# Altium PCB plane_2023-07-22.pcbdoc
Units mil, origin at the board's own origin, x right, y up, seen from the top; angles counter-clockwise.
Board outline 3997.21 x 4242.49 mil, 2 copper layers (Top Layer, Bottom Layer); 10 components, 27 nets, 47 pads, 80 vias.
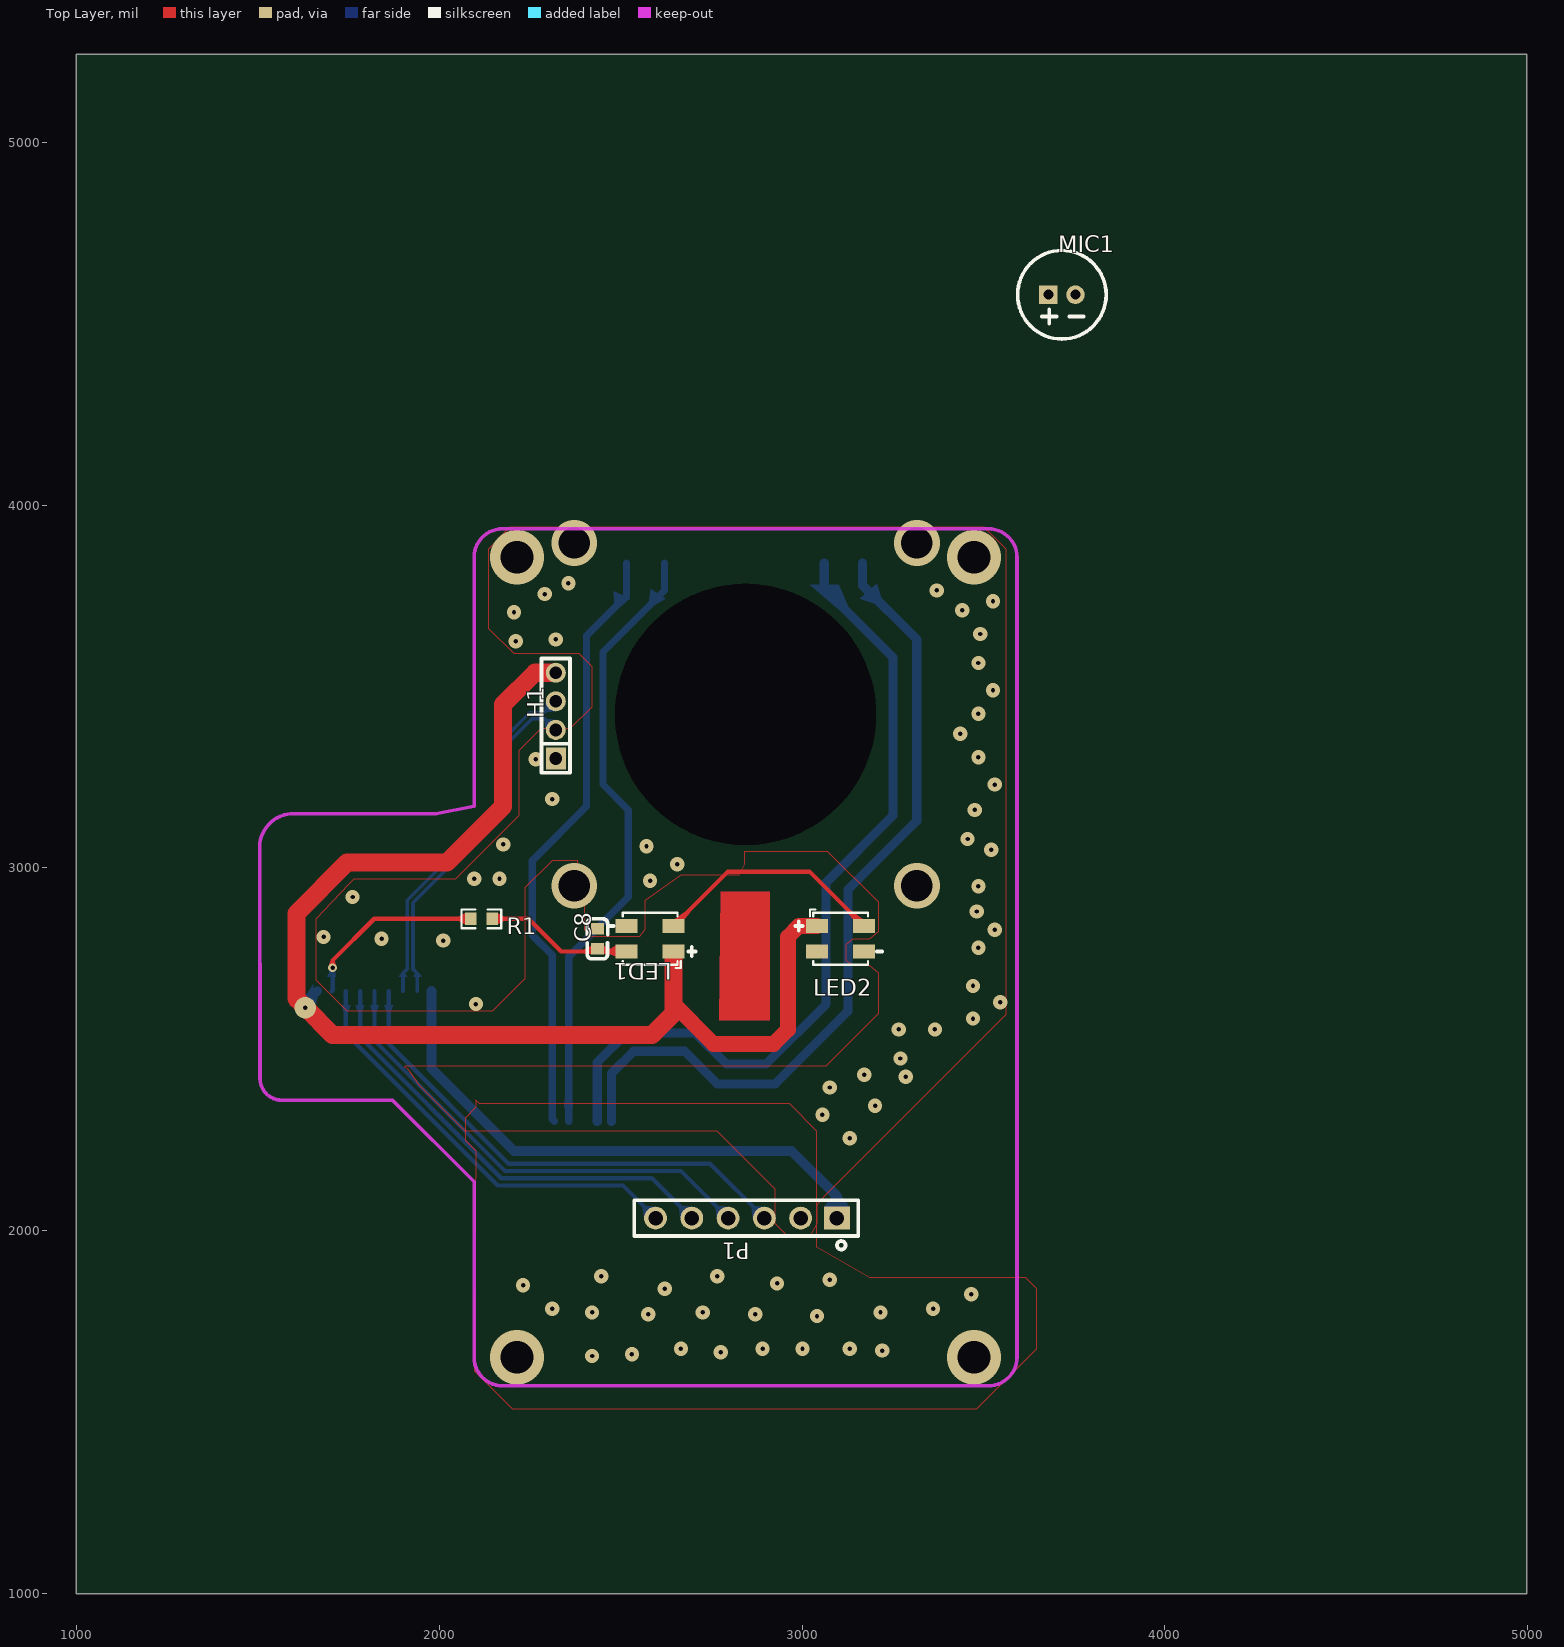
[diagram p0: Top Layer view]
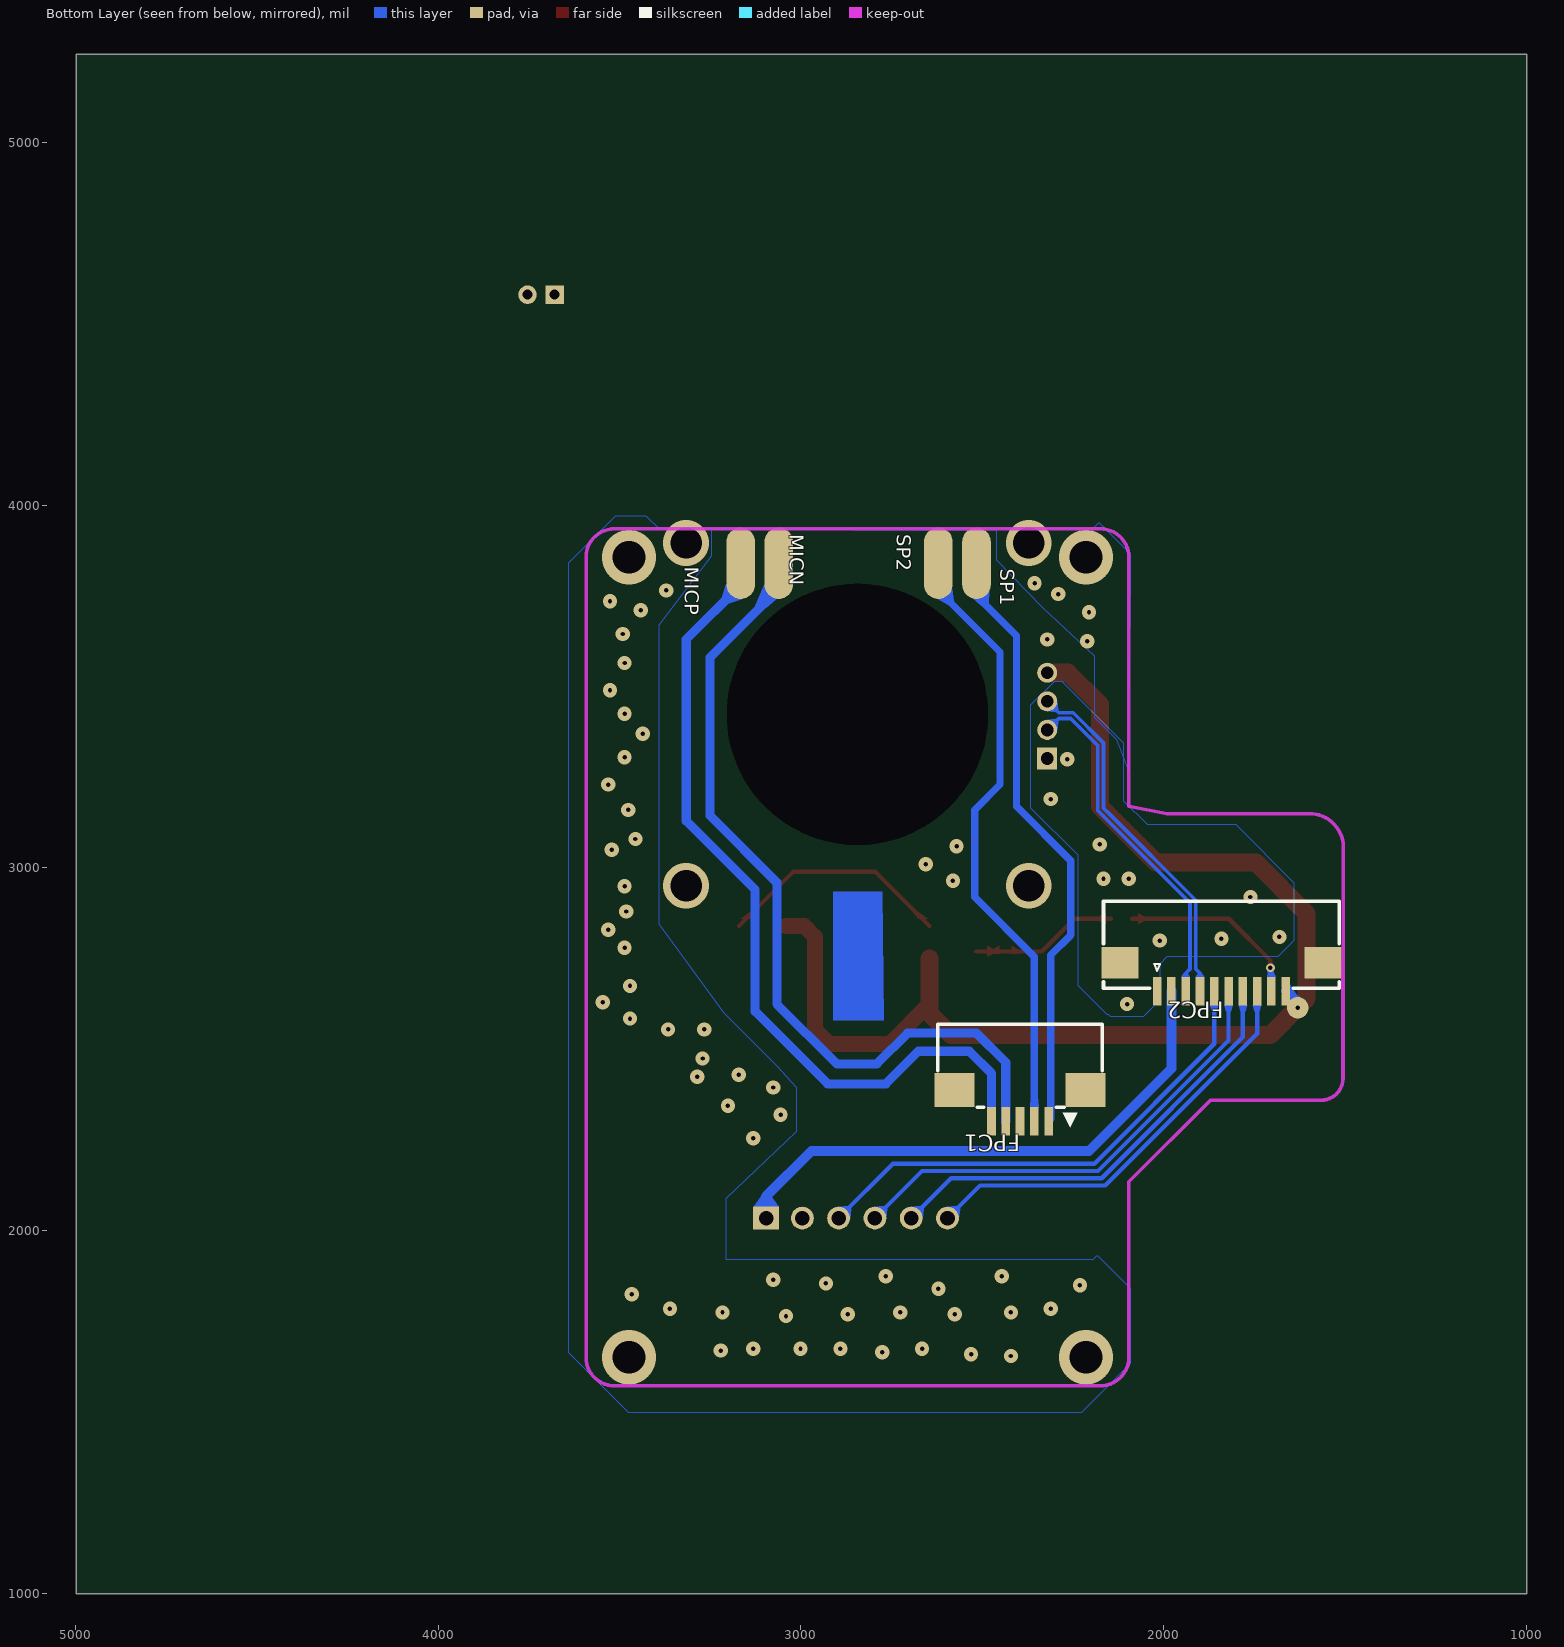
[diagram p1: Bottom Layer view, seen from below]

## Layer stack, top to bottom
Top Layer: signal copper (thickness not stored)
Dielectric: dielectric 12.6, FR-4, Dk 4.8
Bottom Layer: signal copper (thickness not stored)

## Board outline
4997.21,1000 1000,1000 1000,5242.49 4997.21,5242.49
cut-out: 2485.01,3423.19 cw(c2844.34,3423.79) 3203.67,3423.19 cw(c2844.34,3422.59) 2485.01,3423.19

## Components (designator, comment, footprint, x,y, rotation, side; value= is the part's Value field where it differs from the comment)
C8 "0.1uF" C0603 2436.31,2805 r90 top
FPC1 "FFC10001-05SBB124W5M" FFC-SMD_FFC10001-05SBB124W5M 2396.31,2345 r180 bottom
FPC2 "FFC10001-10SBB124W5M" FFC-SMD_FFC10001-10SBB124W5M 1841.31,2700 r180 bottom
H1 "PZ200-1-04-Z" HDR-TH_4P-P2.00-V-M 2321.31,3420 r90 top
LED1 "WS2812B-3535" LED-SMD_4P-L3.5-W3.5-TL_WS2812B 2581.31,2805 r180 top
LED2 "WS2812B-3535" LED-SMD_4P-L3.5-W3.5-TL_WS2812B 3106.31,2805 r0 top
MIC1 "GMI6050P-46DB" MIC-TH_BD6.0-P1.90-D0.4-L-RD 3716.31,4580 r0 top
P1 "Header-Female-2.54_1x6" HDR-TH_6P-P2.54-V-F 2846.31,2035 r180 top
R1 "0" R0603 2116.31,2860 r0 top
? "" ? 3984.73,2753.9 r0 top

## Footprints (in the part's own frame and the unit in brackets; to place one, negate y for a bottom-side part, rotate by r counter-clockwise, add the part's x,y. Pads: shape width x height; smd on the part's side, far side on the other; paste and mask are expansions set on the pad)
C0603 [mm]
  rect 0.8x0.9 smd paste+0 mask+0.051: 1(-0.7,0) 2(0.7,0)
  silkscreen extent -1.41,-0.71 1.39,0.72
FFC-SMD_FFC10001-05SBB124W5M [mm]
  rect 0.6x2 smd paste+0 mask+0.051: 1(2,-1.1) 2(1,-1.1) 3(0,-1.1) 4(-1,-1.1) 5(-2,-1.1)
  rect 2.8x2.4 smd paste+0 mask+0.051: 6(-4.6,1.1) 7(4.6,1.1)
  silkscreen extent -5.75,-1.5 5.75,5.7
FFC-SMD_FFC10001-10SBB124W5M [mm]
  rect 0.6x2 smd paste+0 mask+0.051: 1(-4.5,-1) 2(-3.5,-1) 3(-2.5,-1) 4(-1.5,-1) 5(-0.5,-1) 6(0.5,-1) 7(1.5,-1) 8(2.5,-1) 9(3.5,-1) 10(4.5,-1)
  rect 2.6x2.2 smd paste+0 mask+0.051: 11(-7.1,1) 12(7.1,1)
  silkscreen extent -8.25,-0.8 8.25,5.3
HDR-TH_4P-P2.00-V-M [mm]
  rect 1.524x1.4 hole 0.9 paste+0 mask+0.051: 1(-3,0)
  round 1.4 hole 0.9 paste+0 mask+0.051: 2(-1,0) 3(1,0) 4(3,0)
  silkscreen extent -4,-1 4,1.02
HDR-TH_6P-P2.54-V-F [mm]
  rect 1.8x1.6 hole 1.02 paste+0 mask+0.051: 1(-6.35,0)
  round 1.6 hole 1.02 paste+0 mask+0.051: 2(-3.81,0) 3(-1.27,0) 4(1.27,0) 5(3.81,0) 6(6.35,0)
  silkscreen extent -7.85,-1.25 7.85,2.2
LED-SMD_4P-L3.5-W3.5-TL_WS2812B [mm]
  rect 1.545x0.997 smd paste+0 mask+0.051: 1(-1.638,0.89) 2(-1.638,-0.89) 3(1.638,-0.89) 4(1.638,0.89)
  silkscreen extent -3.17,-1.82 2.92,2.04
MIC-TH_BD6.0-P1.90-D0.4-L-RD [mm]
  rect 1.3x1.3 hole 0.7 paste+0 mask+0.051: 1(-0.95,0)
  round 1.3 hole 0.7 paste+0 mask+0.051: 2(0.95,0)
  silkscreen extent -3.1,-3.1 3.1,3.1
R0603 [mil]
  rect 31.75x34.02 smd paste-3937.01 mask+2: 1(-29.65,0) 2(29.66,0)
  silkscreen extent -55,-26 55,26
? [mil]

## Free pads (board coordinates)
  oval 78.74x196.85 smd far side paste+0 mask+2: 1(2516.31,3840) 1(2621.31,3840) 1(3061.31,3840) 1(3166.31,3840)

## Via types
v1: diameter 39.37, hole 12.2, Top Layer to Bottom Layer, tented both sides, 70 vias
v2: diameter 149.61, hole 90.55, Top Layer to Bottom Layer, tented both sides, 4 vias
v3: diameter 125.98, hole 86.61, Top Layer to Bottom Layer, tented both sides, 4 vias
v4: diameter 24.41, hole 12.2, Top Layer to Bottom Layer, tented both sides, 1 vias
v5: diameter 59.06, hole 12.2, Top Layer to Bottom Layer, tented both sides, 1 vias

## Nets (pads, with @x,y where several pads share a name; then routed paths per layer and width w, separated by ;. In a path a pad name is that pad's centre, name@x,y a point inside that pad or via, vN(x,y) a via of type N, cw(c..) or ccw(c..) an arc to the next point about the centre after c; other vN are vias at no path point)
3.3V: FPC2.2 P1.1 | length 1536.5
  Bottom Layer w27.56: FPC2.2 1979.11,2447.2 2206.31,2220 2971.31,2220 3096.31,2095 P1.1
5V: FPC2.10 H1.4 LED1.1 LED2.1 | length 3554.2
  Top Layer w43.31: 2646.31,2750 2645.81,2625.5 2756.31,2515 2921.31,2515 2961.31,2555 2961.31,2810 2991.31,2840 LED2.1
  Top Layer w50: H1.4 2264.41,3538.1 2176.31,3450 2176.31,3170 2021.31,3015 1746.31,3015 1606.31,2875 1606.31,2640 v5(1631.31,2615) 1706.31,2540 2586.31,2540 2645.78,2599.47 2646.31,2750
  Bottom Layer w25: v5(1631.31,2615) 1631.31,2627.8 FPC2.10
D2+: FPC2.3 H1.2 | length 970.1
  Bottom Layer w10: FPC2.3 1939.71,2710 1928.01,2721.7 1928.01,2761.7 1928.01,2904.1 2167.31,3143.4 2182.31,3158.4 2182.31,3250 2182.31,3337.7 2256.51,3412 2289.91,3412 H1.2
D2-: FPC2.4 H1.3 | length 996.6
  Bottom Layer w10: FPC2.4 1900.41,2710 1912.11,2721.7 1912.11,2761.7 1912.11,2910.8 2151.31,3150 2166.31,3165 2166.31,3250 2166.31,3344.4 2249.91,3428 2289.91,3428 H1.3
FPC1_3: FPC1.3
FPC1_6: FPC1.6
FPC1_7: FPC1.7
FPC2_11: FPC2.11
FPC2_12: FPC2.12
GND: C8.2 FPC2.1 H1.1 LED1.3 LED2.3 P1.2
  other v1: 2421.31,1655 2531.31,1660 2776.31,1665 3221.31,1670 2666.31,1675 2891.31,1675 3001.31,1675 3131.31,1675 3041.31,1765 2576.31,1770 2871.31,1770 2421.31,1775 2726.31,1775 3216.31,1775 2311.31,1785 3361.31,1785 3466.31,1825 2621.31,1840 2231.31,1850 2931.31,1855 3076.31,1865 2446.31,1875 2766.31,1875 3131.31,2255 3056.31,2320 3201.31,2345 3076.31,2395 3286.31,2425 3171.31,2430 3271.31,2475 3266.31,2555 3366.31,2555 3471.31,2585 2101.31,2625 3546.31,2630 3471.31,2675 3486.31,2780 2011.31,2800 1841.31,2805 1681.31,2810 3531.31,2830 3481.31,2880 1761.31,2920 3486.31,2950 2581.31,2965 2096.31,2970 2166.31,2970 2656.31,3010 3521.31,3050 2571.31,3060 2176.31,3065 3456.31,3080 3476.31,3160 2311.31,3190 3531.31,3230 2266.31,3300 3486.31,3305 3436.31,3370 3486.31,3425 3526.31,3490 3486.31,3565 2211.31,3625 2321.31,3630 3491.31,3645 2206.31,3705 3441.31,3710 3526.31,3735 2291.31,3755 3371.31,3765 2356.31,3785
  other v2: 2214.42,1651.54 3474.26,1651.54 2214.42,3856.26 3474.26,3856.26
  other v3: 2371.9,3895.63 3316.78,3895.63
INT: FPC2.7 P1.5 | length 1247.3
  Bottom Layer w12.01: FPC2.7@1782.21,2660.6 1782.21,2534.1 2171.31,2145 2586.31,2145 P1.5
LED2_2: LED2.2
LED2_4: LED1.2 LED2.4 | length 649.3
  Top Layer w12.01: LED1.2 2795.81,2990 3020.81,2990 LED2.4
MIC1_1: MIC1.1
MIC1_2: MIC1.2
MICN: FPC1.4 pad.1@3061.31,3840 | length 2300.6
  Bottom Layer w25: FPC1.4 2435.71,2464.4 2516.31,2545 2706.31,2545 2791.31,2460 2901.31,2460 3066.31,2625 3066.31,2960 3251.31,3145 3251.31,3580 3061.31,3770 pad.1@3061.31,3840
MICP: FPC1.5 pad.1@3166.31,3840 | length 2304.6
  Bottom Layer w25: FPC1.5 2475.01,2433.7 2536.31,2495 2676.31,2495 2766.31,2405 2926.31,2405 3126.31,2605 3126.31,2940 3316.31,3130 3316.31,3630 3166.31,3780 pad.1@3166.31,3840
R1_2: C8.1 LED1.4 R1.2 | length 408.1
  Top Layer w12.01: R1.2 2246.31,2860 2336.31,2770 LED1.4
RGB: FPC2.9 R1.1 | length 513.5
  Top Layer w12.01: v4(1706.31,2725) 1706.31,2745 1821.31,2860 R1.1@2086.61,2860
  Bottom Layer w12.01: FPC2.9 1706.31,2663.4 v4(1706.31,2725)
S$2122: 
S$2130: 
S$2140: 
SCL2: FPC2.6 P1.4 | length 1313.4
  Bottom Layer w12.01: FPC2.6 1821.61,2524.7 2181.31,2165 2666.31,2165 P1.4
SDA2: FPC2.5 P1.3 | length 1379.5
  Bottom Layer w12.01: FPC2.5 1861.01,2515.3 2191.31,2185 2746.31,2185 P1.3
SHUT: FPC2.8 P1.6 | length 1181.2
  Bottom Layer w12.01: FPC2.8 1742.91,2543.4 2161.31,2125 2506.31,2125 P1.6
SP1: FPC1.1 pad.1@2516.31,3840 | length 1671.4
  Bottom Layer w20: FPC1.1 2311.31,2307.9 2311.31,2760 2256.31,2815 2256.31,3020 2406.31,3170 2406.31,3640 2516.31,3750 pad.1@2516.31,3840
SP2: FPC1.2 pad.1@2621.31,3840 | length 1705.8
  Bottom Layer w20: FPC1.2 2356.91,2755.6 2521.31,2920 2521.31,3160 2451.31,3230 2451.31,3595 2621.31,3765 pad.1@2621.31,3840
copper on no net:
  other v3: 2371.9,2950.75 3316.78,2950.75

## Polygon pours and split planes (outlines as drawn)
GND on Bottom Layer (solid): 2011.31,2700 2011.31,2635 2056.31,2590 2146.31,2590 2151.31,2595 2156.31,2595 2236.31,2675 2236.31,3035 2366.31,3165 2366.31,3450 2301.31,3515 2281.31,3515 2111.31,3345 2111.31,3185 2046.31,3120 1801.31,3120 1641.31,2960 1641.31,2800 1686.31,2755 1991.31,2755 2011.31,2735
GND on Bottom Layer (solid): 3641.31,1665 3476.31,1500 2226.31,1500 2091.31,1635 2091.31,1840 2181.31,1930 2186.31,1930 2196.31,1920 3206.31,1920 3206.31,2090 3011.31,2275 3011.31,2395 3066.31,2455 3211.31,2600 3391.31,2845 3391.31,3670 3246.31,3860 3246.31,3935 2461.31,3930 2461.31,3850 2336.31,3720 2191.31,3585 2191.31,3415 2131.31,3355 2096.31,3265 2096.31,3450 2091.31,3790 2091.31,3865 2176.31,3950 2181.31,3950 2196.31,3935 3391.31,3935 3426.31,3970 3511.31,3970 3641.31,3840 3641.31,1665
GND on Top Layer (solid): 2961.31,1985 2926.31,2020 2926.31,2115 2766.31,2275 2071.31,2275 1946.31,2400 1914,2446.15 1906.31,2450 1906.31,2455 3066.31,2455 3211.31,2600 3211.31,2710 3186.31,2730 3141.31,2730 3121.31,2745 3121.31,2790 3141.31,2805 3186.31,2805 3211.31,2825 3211.31,2905 3071.31,3045 2841.31,3045 2841.31,3010 2826.31,2980 2666.31,2980 2566.31,2910 2566.31,2830 2551.31,2810 2416.31,2810 2401.31,2830 2401.31,2890 2381.31,3020 2311.31,3020 2236.31,2945 2236.31,2695 2146.31,2605 1746.31,2605 1661.31,2690 1661.31,2860 1751.31,2955 1766.31,2970 2046.31,2970 2221.31,3145 2221.31,3325 2281.31,3385 2361.31,3385 2421.31,3445 2421.31,3555 2386.31,3590 2206.31,3590 2136.31,3660 2136.31,3880 2196.31,3940 3501.31,3940 3561.31,3880 3561.31,2595 3061.31,2095 3041.31,2070 3041.31,2020 3021.31,1985 2961.31,1985
GND on Top Layer (solid): 2096.31,1760 2096.31,1615 2201.31,1510 3481.31,1510 3646.31,1675 3646.31,1840 3616.31,1870 3186.31,1870 3041.31,1955 3041.31,2015 3041.31,2275 2966.31,2350 2111.31,2350 2101.31,2360 2101.31,2340 2071.31,2310 2071.31,2250 2101.31,2220

## Keep-outs
Keep-Out Layer:
  lines w10: 2096.31,1651.54 ccw(c2175.05,1651.54) 2175.05,1572.8 ; 2096.31,3856.26 cw(c2175.05,3856.26) 2175.05,3935 ; 3513.63,1572.8 ccw(c3513.63,1651.54) 3592.37,1651.54 ; 3513.63,3935 cw(c3513.63,3856.26) 3592.37,3856.26
  lines w10 net S$2122: 1506.31,2420 ccw(c1566.31,2420) 1566.31,2360
  lines w10 net S$2130: 1505,3057.12 cw(c1598.83,3056.2) 1601.31,3150

## Other copper
Top Layer:
  region net LED2_4: 3140.37,2859.67 3166.16,2859.67 3141.63,2877.68 3124.64,2877.68
  region net R1_2: 2486.43,2754.99 2486.43,2785.01 2468.42,2776 2468.42,2764
  region net LED2_4: 2650.47,2859.67 2676.19,2859.67 2691.98,2877.68 2675,2877.68
  region net RGB: 2070.78,2875.01 2070.78,2844.99 2052.77,2854 2052.77,2866
  region net R1_2: 2161.84,2875.01 2161.84,2844.99 2179.85,2854 2179.85,2866
  region net R1_2: 2454.03,2785.01 2454.03,2761.69 2472.04,2764 2472.04,2776
  region net R1_2: 2418.59,2761.69 2418.59,2785.01 2400.58,2776 2400.58,2764
  region net 5V: 1601.84,2613.15 1633.16,2644.47 1623.99,2657.68 1588.63,2622.32
  region net 5V: 1629.46,2585.53 1660.78,2616.85 1677.41,2604.25 1642.06,2568.9
  region net RGB: 1697.16,2733.07 1715.46,2733.07 1712.31,2741.62 1700.31,2741.62
  region net 5V: 2303.09,3517.44 2303.08,3558.77 2283.78,3563.1 2283.8,3513.1
Bottom Layer:
  region net MICP: 3205.68,3783.35 3158.5,3742.36 3200.42,3728.21 3219.05,3744.94
  region net MICN: 3100.68,3780.94 3021.94,3780.94 3097.11,3716.52 3125.73,3723.26
  region net SP1: 2526.93,3743.04 2481.17,3763.18 2482.15,3729.98 2501.78,3721.33
  region net SP2: 2624.86,3741.74 2583.53,3769.87 2578.9,3736.73 2595.73,3725.28
  region net 5V: 1652.33,2680.07 1652.33,2621.26 1640.15,2618.96 1631.31,2645.48
  region net RGB: 1715.33,2700 1691.7,2700 1700.31,2718.01 1712.31,2718.01
  region net SHUT: 1731.07,2621.26 1754.69,2621.26 1748.91,2603.25 1736.91,2603.25
  region net INT: 1770.44,2621.26 1794.06,2621.26 1788.21,2603.25 1776.21,2603.25
  region net SCL2: 1809.81,2621.26 1833.43,2621.26 1827.61,2603.25 1815.61,2603.25
  region net SDA2: 1849.18,2621.26 1872.8,2621.26 1867.01,2603.25 1855.01,2603.25
  region net D2-: 1912.18,2700 1888.56,2700 1895.41,2710 1905.41,2710
  region net D2+: 1951.55,2700 1927.92,2700 1934.71,2710 1944.71,2710
  region net SP2: 2368.75,2341.06 2345.13,2341.06 2346.91,2371.06 2366.91,2371.06
  region net 3.3V: 3061.86,2066.5 3130.76,2066.5 3110.09,2095 3082.53,2095
  region net 5V: 1660.44,2619.83 1622.87,2643.3 1641.72,2655.89 1663.49,2642.3
  region net RGB: 1697.16,2716.93 1715.46,2716.93 1712.31,2708.38 1700.31,2708.38
  region net SDA2: 2864.88,2033.03 2898.28,2066.43 2870.23,2069.57 2861.74,2061.08
  region net SCL2: 2764.88,2033.03 2798.28,2066.43 2770.23,2069.57 2761.74,2061.08
  region net INT: 2664.88,2033.03 2698.28,2066.43 2670.23,2069.57 2661.74,2061.08
  region net SHUT: 2564.88,2033.03 2598.28,2066.43 2570.23,2069.57 2561.74,2061.08
  region net D2+: 2293.81,3378.89 2323.02,3408.14 2298.3,3410.68 2291.23,3403.61
  region net D2-: 2293.81,3461.11 2323.02,3431.86 2298.3,3429.32 2291.23,3436.39
Multi-Layer:
  region: 2776.31,2935 2771.31,2580 2911.31,2580 2911.31,2935 2846.31,2935

## Silkscreen, mask and mechanical layers (free items; w line width, h text height)
Bottom Overlay:
  text "SP2" at 2735.99,3920 h39.37 r90
  text "MICN" at 3030.99,3920 h39.37 r90
  text "MICP" at 3320.99,3830 h39.37 r90
  text "SP1" at 2450.99,3825 h39.37 r90